# Altium PCB CW308T_NRF52840.PcbDoc
Units mil, origin at the board's own origin, x right, y up, seen from the top; angles counter-clockwise.
Board outline 2060 x 2540 mil, 2 copper layers (Top Layer, Bottom Layer); 36 components, 45 nets, 217 pads, 274 vias.
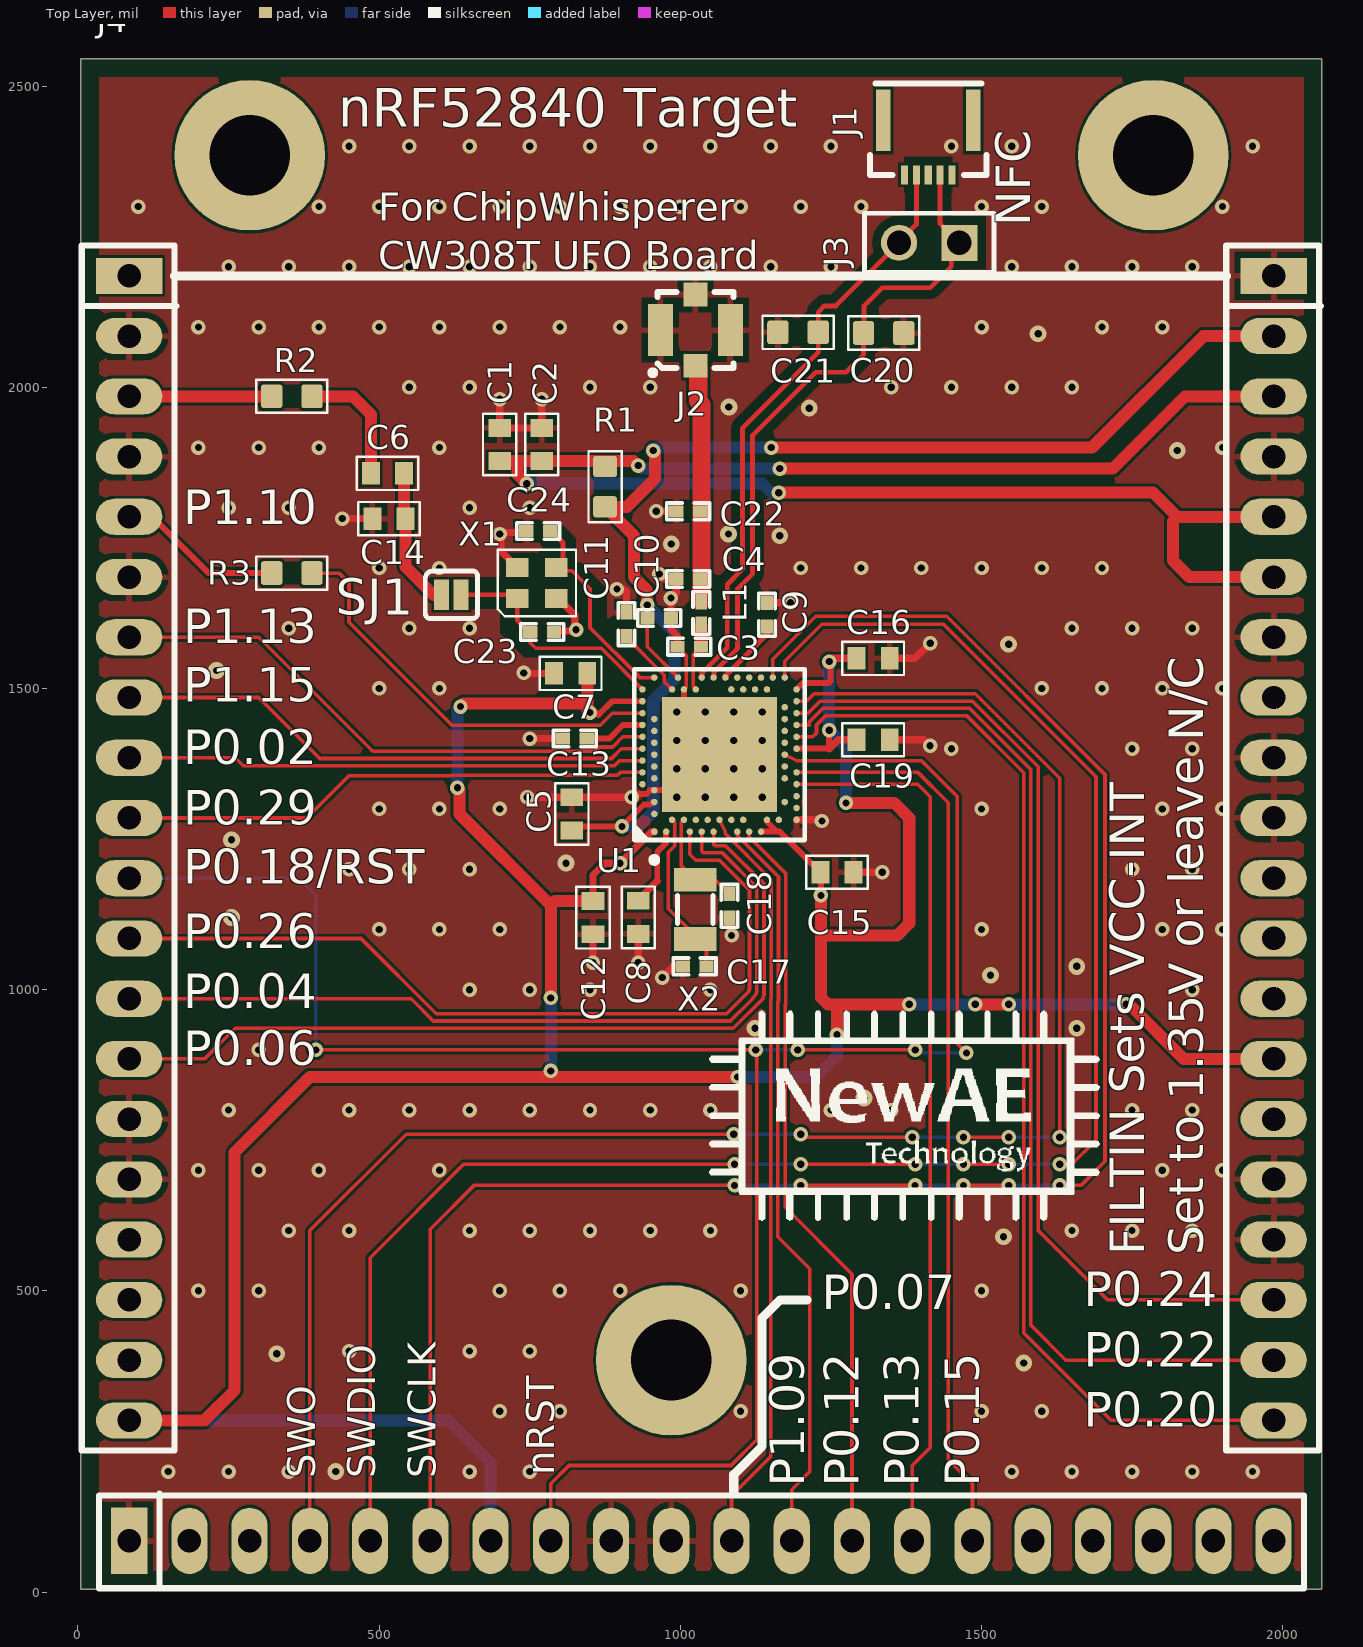
[diagram p0: Top Layer view]
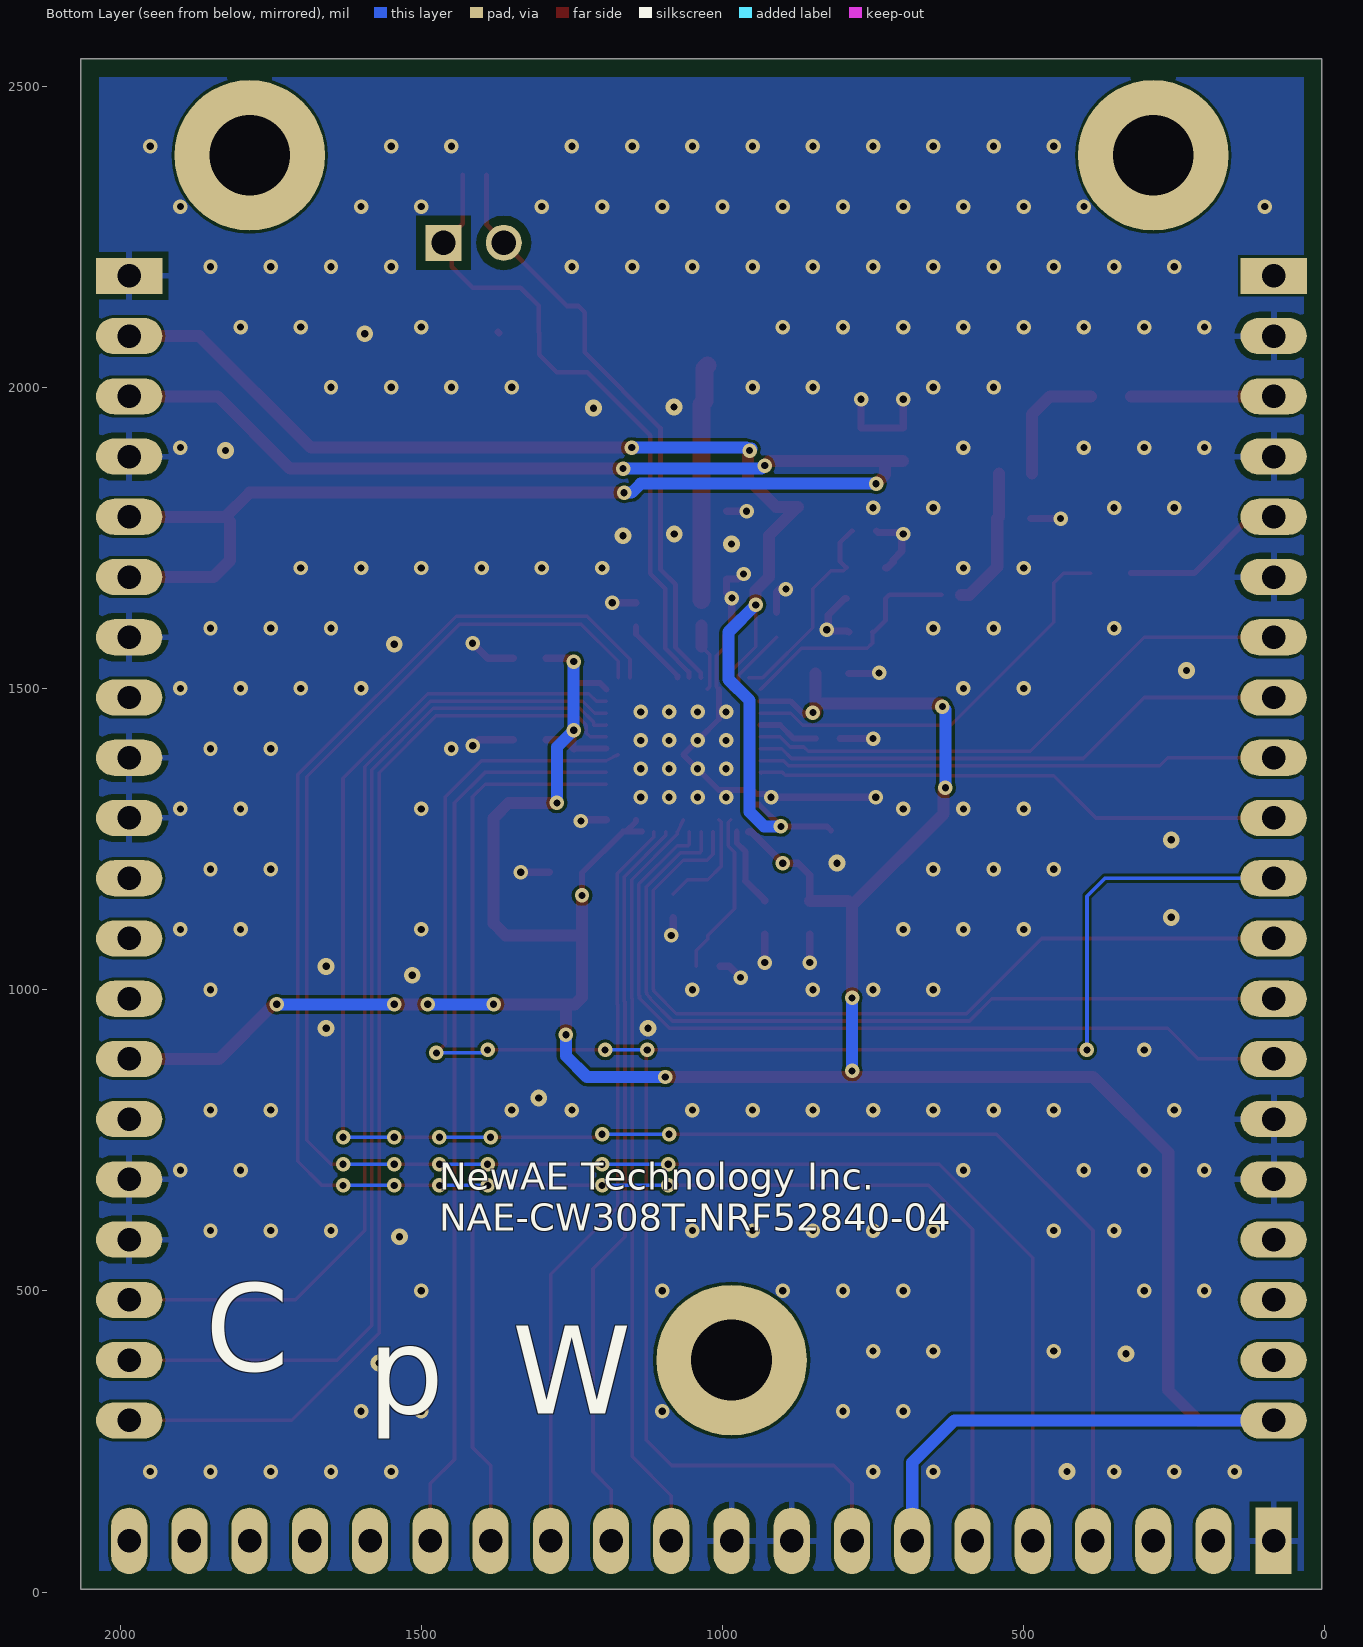
[diagram p1: Bottom Layer view, seen from below]

## Layer stack, top to bottom
Top Solder: solder mask 0.4, Solder Resist, Dk 3.5
Top Layer: signal copper 1.4
Dielectric 1: dielectric 12.6, FR-4, Dk 4.8
Bottom Layer: signal copper 1.4
Bottom Solder: solder mask 0.4, Solder Resist, Dk 3.5

## Board outline
5,5 5,2545 2065,2545 2065,5

## Design rules (kind name [scope] priority, off if disabled: settings)
BoardOutlineClearance Silk_to_Outline [(OnLayer('Top Overlay'))] p1: gap=0 ignorepadtopadclearanceinfootprint=FALSE
BoardOutlineClearance [All] p2: gap=30 ignorepadtopadclearanceinfootprint=FALSE
Clearance Clearance_NFC [InNet('NFC1') OR InNet('NFC2')] p1: gap=5 ignorepadtopadclearanceinfootprint=FALSE except(0: Arc-Hole Track-Hole SMDPad-Hole THPad-Hole Via-Hole Fill-Hole Poly-Hole Region-Hole Text-Hole; 15: Arc-Fill Arc-Poly Arc-Region Track-Fill Track-Poly Track-Region SMDPad-Fill SMDPad-Poly SMDPad-Region THPad-Fill THPad-Poly THPad-Region Via-Fill Via-Poly Via-Region Fill-Fill Fill-Poly Fill-Region Poly-Poly Poly-Region Region-Region)
Clearance [All] p2: gap=5 ignorepadtopadclearanceinfootprint=FALSE except(0: Arc-Hole Track-Hole SMDPad-Hole THPad-Hole Via-Hole Fill-Hole Poly-Hole Region-Hole Text-Hole)
HoleSize [All] p1: absolutevalues=TRUE maxlimit=200 minlimit=1 maxpercent=80.000 minpercent=20.000
MinimumSolderMaskSliver [All] p1: minsoldermaskwidth=5
PlaneConnect PlaneConnect_viaDirect [IsVia] p1: planeconnectstyle=Direct reliefexpansion=20 reliefentries=4 reliefconductorwidth=10 reliefairgap=10
PlaneConnect [All] p2: planeconnectstyle=Relief reliefexpansion=20 reliefentries=4 reliefconductorwidth=10 reliefairgap=10
PolygonConnect PolygonConnect_viaDirect [All vs isVia] p1: connectstyle=Direct reliefconductorwidth=10 reliefentries=4 polygonreliefangle="90 Angle" airgapwidth=10
PolygonConnect [All] p2: connectstyle=Relief reliefconductorwidth=10 reliefentries=4 polygonreliefangle="90 Angle" airgapwidth=10
RoutingVias [All] p1: holewidth=28 width=24 viastyle="Through Hole" minholewidth=12 minwidth=24 maxholewidth=12 maxwidth=50
SilkToSilkClearance [All] p1: silktosilkclearance=5
SilkToSolderMaskClearance [IsPad] p1: minsilkscreentomaskgap=5 clearancetoexposedcopper=TRUE
SolderMaskExpansion [All] p1: expansion=4 istentingtop=FALSE
Width [All] p1: maxlimit=100 minlimit=6 preferedwidth=8 minimp=50.000000 maximp=50.000000 favimp=50.000000
25 further rules are at their usual default settings.

## Classes and differential pairs
component class NRF52840_UFO: J4

## Components (designator, comment, footprint, x,y, rotation, side; value= is the part's Value field where it differs from the comment)
C1 "2u2" CAPC0603_M 700,1905 r90 top
C2 "100n" CAPC0603_M 770,1905 r90 top
C3 "1.0pF" CAPC1005X04L 1014.79,1569.35 r0 top
C4 "1.0pF" CAPC1005X04L 1013,1681.75 r0 top
C5 "1u" CAPC0603_M 820,1291.73 r90 top
C6 "100p" CAPC0603_M 513.77,1857.05 r180 top
C7 "100n" CAPC0603_M 817.95,1525 r180 top
C8 "100n" CAPC0603_M 930,1120 r270 top
C9 "820pF" CAPC1005X04L 1143.74,1622.44 r90 top
C10 "N.C." CAPC1005X04L 965,1616.75 r180 top
C11 "100pF" CAPC1005X04L 910.47,1606.69 r90 top
C12 "1u" CAPC0603_M 855,1119.39 r270 top
C13 "N.C." CAPC1005X04L 824.84,1416.73 r180 top
C14 "100p" CAPC0603_M 516.33,1782.05 r180 top
C15 "2u2" CAPC0603_M 1260,1195 r0 top
C16 "100n" CAPC0603_M 1320,1550 r0 top
C17 "12pF" CAPC1005X04L 1023.66,1038.68 r180 top
C18 "12pF" CAPC1005X04L 1081.73,1139.08 r270 top
C19 "100n" CAPC0603_M 1320,1415 r0 top
C20 "330p" RESC1608X55N 1337.6,2090.09 r0 top
C21 "330p" RESC1608X55N 1195.36,2091.14 r0 top
C22 "N.C." CAPC1005X04L 1013,1794.05 r180 top
C23 "12pF" CAPC1005X04L 770.68,1593.53 r0 top
C24 "12pF" CAPC1005X04L 763.97,1761.38 r180 top
J1 "FPC 0.5mm RA SMD" FPC_05P-0.5mm-RA-SMD 1450.94,2352.75 r180 top
J2 "0734120110" 0734120110 1025,2095 r0 top
J3 "MTLW-102-05-L-S-172" SMTC-MTLW-102-05-X-S-172 1463.13,2239.87 r180 top
J4 "CW308_TARGETCON" CW308_TBOARD_CONN 85,2185 r0 top locked
L1 "3.9nH" INDC1005X04L 1034.79,1625.35 r90 top
R1 "12R" RESC1608X55N 875,1835 r270 top
R2 "12R" RESC1608X55N 355,1985 r180 top
R3 "12R" RESC1608X55N 355,1691.59 r180 top
SJ1 "NO" SJ_2S_NO 620,1655.54 r0 top
U1 "nRF52840-QIAA" AQFN50P700X700X85_HS-74N 1065,1390.16 r90 top
X1 "ABM10AIG-32.000MHZ-4Z-T3" "2.5x2mm XTAL" 761.77,1675 r0 top value=32.000MHz
X2 "32.768kHz" XTAL_3215 1024.65,1133.17 r90 top

## Footprints (in the part's own frame and the unit in brackets; to place one, negate y for a bottom-side part, rotate by r counter-clockwise, add the part's x,y. Pads: shape width x height; smd on the part's side, far side on the other; paste and mask are expansions set on the pad)
"2.5x2mm XTAL" [mm]
  rect 0.95x0.8 smd: 1(-0.825,-0.65) 2(0.825,-0.65) 3(0.825,0.65) 4(-0.825,0.65)
  silkscreen extent -1.65,-1.4 1.65,1.4, body extent -1.27,-1 1.27,1, height 0.55
0734120110 [mm] "Molex 0734120110 (UMC)"
  rect 1x1 smd: 1(0,-1.5) 3(0,1.5)
  rect 1.05x2.2 smd: 2(-1.475,0) 4(1.475,0)
  silkscreen extent -1.9,-1.9 1.6,1.6, body extent -1.5,-1.54 1.5,1.54, height 1.29
AQFN50P700X700X85_HS-74N [mm] "AQFN, 73-Leads, Body 7.00x7.00mm, Pitch 0.50mm, Thermal Pad 4.95x4.95mm, IPC Medium Density"
  rect 4.85x4.85 smd paste-0.711 mask+0.05: 74(0,0)
  round 0.275 smd paste+0.012 mask+0.05: A8(-1.25,3.25) A10(-0.75,3.25) A12(-0.25,3.25) A14(0.25,3.25) A16(0.75,3.25) A18(1.25,3.25) A20(1.75,3.25) A22(2.25,3.25) A23(2.75,3.25) AA24(3.25,-2.25) AB2(-2.75,-2.5) AC5(-2,-2.75) AC9(-1,-2.75) AC11(-0.5,-2.75) AC13(0,-2.75) AC15(0.5,-2.75) AC17(1,-2.75) AC19(1.5,-2.75) AC21(2,-2.75) AC24(3.25,-2.75) AD2(-2.75,-3.25) AD4(-2.25,-3.25) AD6(-1.75,-3.25) AD8(-1.25,-3.25) AD10(-0.75,-3.25) AD14(0.25,-3.25) AD16(0.75,-3.25) AD18(1.25,-3.25) AD20(1.75,-3.25) AD22(2.25,-3.25) AD23(2.75,-3.25) B1(-3.25,2.75) B3(-2.5,2.75) B5(-2,2.75) B7(-1.5,2.75) B9(-1,2.75) B11(-0.5,2.75) B13(0,2.75) B15(0.5,2.75) B17(1,2.75) B19(1.5,2.75) B24(3.25,2.75) C1(-3.25,2.25) D2(-2.75,2) D23(2.75,2) E24(3.25,1.75) F2(-2.75,1.5) F23(2.75,1.5) G1(-3.25,1.25) H2(-2.75,1) H23(2.75,1) J1(-3.25,0.75) J24(3.25,0.75) K2(-2.75,0.5) L1(-3.25,0.25) L24(3.25,0.25) M2(-2.75,0) N24(3.25,-0.25) P2(-2.75,-0.5) P23(2.75,-0.5) R1(-3.25,-0.75) R24(3.25,-0.75) T2(-2.75,-1) T23(2.75,-1) U1(-3.25,-1.25) U24(3.25,-1.25) V23(2.75,-1.5) W1(-3.25,-1.75) W24(3.25,-1.75) Y2(-2.75,-2) Y23(2.75,-2)
  silkscreen extent -4.56,-3.6 3.6,3.6, body extent -3.55,-3.55 3.55,3.55, height 0.85
CAPC0603_M [mm]
  rect 0.75x0.95 smd: 1(-0.7,0) 2(0.7,0)
  silkscreen extent -1.3,-0.7 1.3,0.7, body extent -0.85,-0.45 0.85,0.45, height 0.9
CAPC1005X04L [mm] "Chip Capacitor, 2-Leads, Body 1.0x0.5mm, IPC High Density"
  rect 0.6x0.5 smd: 1(-0.5,0) 2(0.5,0)
  silkscreen extent -0.9,-0.35 0.9,0.35, body extent -0.51,-0.25 0.51,0.25, height 0.5
CW308_TBOARD_CONN [mil]
  rect 110x60 hole 39: A1(0,0) C1(1900,0)
  oval 110x60 hole 39: A2(0,-100) A3(0,-200) A4(0,-300) A5(0,-400) A6(0,-500) A7(0,-600) A8(0,-700) A9(0,-800) A10(0,-900) A11(0,-1000) A12(0,-1100) A13(0,-1200) A14(0,-1300) A15(0,-1400) A16(0,-1500) A17(0,-1600) A18(0,-1700) A19(0,-1800) A20(0,-1900) C2(1900,-100) C3(1900,-200) C4(1900,-300) C5(1900,-400) C6(1900,-500) C7(1900,-600) C8(1900,-700) C9(1900,-800) C10(1900,-900) C11(1900,-1000) C12(1900,-1100) C13(1900,-1200) C14(1900,-1300) C15(1900,-1400) C16(1900,-1500) C17(1900,-1600) C18(1900,-1700) C19(1900,-1800) C20(1900,-1900)
  rect 60x110 hole 39: B1(0,-2100)
  oval 60x110 hole 39: B2(100,-2100) B3(200,-2100) B4(300,-2100) B5(400,-2100) B6(500,-2100) B7(600,-2100) B8(700,-2100) B9(800,-2100) B10(900,-2100) B11(1000,-2100) B12(1100,-2100) B13(1200,-2100) B14(1300,-2100) B15(1400,-2100) B16(1500,-2100) B17(1600,-2100) B18(1700,-2100) B19(1800,-2100) B20(1900,-2100)
  round 250 hole 134: MH1(200,200) MH2(900,-1800) MH2(1700,200)
  silkscreen extent -79,-2179 1979,50, body extent -50,-2149 1950,50, height 48
FPC_05P-0.5mm-RA-SMD [mm] "FPC, 5-Leads, Pitch 0,5mm"
  rect 0.6x2.6 smd: 0(-0.9,-2.3) 0(2.9,-2.3)
  rect 0.3x0.8 smd: 1(0,0) 2(0.5,0) 3(1,0) 4(1.5,0) 5(2,0)
  silkscreen extent -1.45,-3.85 3.45,0, body extent -1.3,-3.85 3.3,0.2, height 1.2
INDC1005X04L [mm] "Chip Inductor, 2-Leads, Body 1.0x0.5mm, IPC High Density"
  rect 0.65x0.5 smd: 1(-0.475,0) 2(0.475,0)
  silkscreen extent -0.9,-0.35 0.9,0.35, body extent -0.5,-0.3 0.5,0.3, height 0.5
RESC1608X55N [mm] "Chip Resistor, Body 1.6x0.8mm, EIA 0603, IPC Medium Density"
  round 0.254 on Mech15: 0(0,0)
  rrect25% 0.9x1 smd: 1(-0.85,0) 2(0.85,0)
  Top Layer pour cut-out: -0.6,0.5 0.6,0.5 0.6,-0.5 -0.6,-0.5
  silkscreen extent -1.5,-0.7 1.5,0.7, body extent -0.87,-0.47 0.88,0.48, height 0.54
SJ_2S_NO [mil] "Solder Jumper, open (no paste)"
  rect 25x50 smd paste-393.7: 1(-16.22,0) 2(16.22,0)
  silkscreen extent -43,-39 43,39
SMTC-MTLW-102-05-X-S-172 [mm] "Terminal Assembly, 1x2 Pins, Vertical, 2.54mm Pitch, Male"
  rect 1.52x1.52 hole 1.02: 1(0,0)
  round 1.52 hole 1.02: 2(2.54,0)
  silkscreen extent -1.46,-1.24 4,1.24, body extent -1.27,-1.24 3.81,1.24, height 5.89
XTAL_3215 [mm] "XTAL SMD 3.2 x 1.5 mm"
  rect 1x1.8 smd: 1(-1.25,0) 2(1.25,0)
  silkscreen extent -0.6,-0.75 0.6,0.75, body extent -1.6,-0.75 1.6,0.75, height 0.81

## Part data
C1 C15: library part CCHIP-2u2-0603, "2u2, 0603", Case-EIA=0603, Case-Metric=1608, Manufacture 1=Samsung, Manufacture Part Number 1=CL10B225KP8NNNC, Rated Voltage=10VDC, Supplier Part Number 1=1276-1134-2-ND, Component Group=Capacitor, Component Type=Standard, Mounting Technology=SMT, Part Number=CCHIP-2u2-0603, Pin Count=2, Supplier 1=Digi-Key
C2 C7 C8 C16 C19: library part CCHIP-100n-0603, "100n, 0603", Case-EIA=0603, Case-Metric=1608, Manufacture 1=Kemet, Manufacture Part Number 1=C0603C104K5RACTU, Rated Voltage=50VDC, Supplier Part Number 1=399-5089-2-ND, Component Group=Capacitor, Component Type=Standard, Mounting Technology=SMT, Part Number=CCHIP-100n-0603, Pin Count=2, Supplier 1=Digi-Key
C3 C4: library part C0402-1.0p, "Capacitor, NP0, ±5%", Footprint Doc=0402, LatestRevisionDate=2017-02-23, Note=50V, Part Number=C0402-1.0p, Pin Count=2, Published=2009-05-08, Publisher="Nordic Semiconductor"
C5 C12: library part CCHIP-1u-0603, "1u, 0603, 50V", Case-EIA=0603, Case-Metric=1608, Manufacture Part Number 1=CL10A105KB8NNNC, Rated Voltage=50VDC, Supplier Part Number 1=1276-1860-1-ND, Component Group=Capacitor, Component Type=Standard, Mounting Technology=SMT, Part Number=CCHIP-1u-0603, Pin Count=2, Supplier 1=Digi-Key
C6 C14: library part CCHIP-100p-0603, "100p, 0603", Case-EIA=0603, Case-Metric=1608, Manufacture 1=KEMET, Manufacture Part Number 1=C0603C101K5RACTU, Rated Voltage=50V, Supplier Part Number 1=399-7824-1-ND, Component Group=Capacitor, Component Type=Standard, Mounting Technology=SMT, Part Number=CCHIP-100p-0603, Pin Count=2, RoHS=Yes, Supplier 1=Digi-Key
C9: library part C0402-820p, "Capacitor, NP0, ±5%", Footprint Doc=0402, LatestRevisionDate=2009-05-08, Note=50V, Part Number=C0402-820p, Pin Count=2, Published=2009-05-08, Publisher="Nordic Semiconductor"
C10 C13 C22: library part C0402-N.C., "Not mounted", Assembly="Not mounted", Footprint Doc=0402, LatestRevisionDate=2009-05-08, Part Number=C0402-N.C., Pin Count=2, Published=2009-05-08, Publisher="Nordic Semiconductor"
  C22: Note="Chip Cap"
C11: library part C0402-100p, "Capacitor, NP0, ±5%", Footprint Doc=0402, LatestRevisionDate=2009-05-08, Note=50V, Part Number=C0402-100p, Pin Count=2, Published=2009-05-08, Publisher="Nordic Semiconductor"
C17 C18 C23 C24: library part C0402-12p, "Capacitor, NP0, ±2%", Footprint Doc=0402, LatestRevisionDate=2011-05-11, Note=50V, Part Number=C0402-12p, Pin Count=2, Published=2009-05-08, Publisher="Nordic Semiconductor"
C20 C21: library part CCHIP-330P-0603-100V, "CAP CER 330PF 100V X7R 0603", Case-EIA=0603, Case-Metric=1608, Manufacture 1="Murata Electronics North America", Manufacture Part Number 1=GRM188R72A331KA01D, Rated Voltage=100V, Supplier Part Number 1=490-1464-1-ND, Tolerance=±10%, Component Group=Capacitor, Component Type=Standard, Mounting Technology=SMT, Part Number=CCHIP-330P-0603-100V, Pin Count=2, PP Material Stack=0, PP Rotation=0, Supplier 1=Digi-Key
J1: library part FPC_05P-0.5mm-RA-SMD, "0.5mm FPC, 5P,Right Angle SMT,Double Contact,H=1.2mm,White, Tin plated", 2nd source part number=WM9836CT-ND, Manufacturer=W-CON, Manufacturer Part Number=5141-05RZDNWR01, Part number IPS=00000007792, 2nd source Supplier=Digi-Key, Artikkelnr Noca=55010020, Artikkelnr Simpro=N.A., Datasheet=\\hizz\pro\app9717\Datasheet\connectores\W-CON\5141-XXRZDNXX0X.pdf, Footprint Doc=FPC_05P-0.5mm-RA-SMD, LatestRevisionDate=2016-04-21, Part Number=FPC_05P-0.5mm-RA-SMD, Pin Count=7, Published=2015-06-22, Publisher="Nordic Semiconductor", Supplier=Cabcon, Supplier part number=5141-05RZDNWR01
J2: library part UMC_MALE, "UMC RCPT STR 50 OHM SMD", Manufacture 1=Molex, Supplier Part Number 1=WM5587CT-ND, Component Group=Connector, Component Type=Standard, Manufacture Part Number 1=0734120110, Mounting Technology=SMT, Part Number=UMC_MALE, Pin Count=5, PP Material Stack=0, PP Rotation=0, RoHS=Yes, Supplier 1=Digi-Key
J3: library part CMP-1024-00067-1, Manufacturer=Samtec, Temperature Range="-55 to 125 degC", ComponentLink1Description="Manufacturer URL", ComponentLink1URL=http://www.samtec.com, ComponentLink2Description=Datasheet, ComponentLink2URL=http://www.samtec.com/documents/webfiles/pdf/MTLW_TH.PDF, ComponentLink3Description="Package Specification", ComponentLink3URL=http://www.samtec.com/documents/webfiles/cpdf/MTLW-1XX-XX-XX-X-XXX-XX-XX-MKT1.pdf, DatasheetVersion=F-214, Mounting Technology=Through-hole, Orientation=Vertical, PackageDescription="Low Profile Terminal Assembly", PackageReference=MTLW-102-05-X-S-172, PackageVersion="T, 6/1991", PartNumber=MTLW-102-05-L-S-172, Pitch="2.54 mm", RoHS=True
J4: library part CW308_TBOARD, "CW308 \"Standard\" Target Board Connector", Component Group=Mechanical, Component Type=Standard, Mounting Technology=Through-hole, Part Number=CW308_TBOARD, Pin Count=60, Pitch=2.54mm
L1: library part L0402-3n9, "High frequency chip inductor ±5%", Footprint Doc=0402, LatestRevisionDate=2012-09-19, Part Number=L0402-3n9, Pin Count=2, Published=2009-05-08, Publisher="Nordic Semiconductor"
R1 R2 R3: library part RCHIP-12R-0603, "12R res, 0603, 1%, 1/10W", Case-EIA=0603, Case-Metric=1608, Manufacture 1=Yageo, Manufacture Part Number 1=RC0603FR-0712RL, Rated Power=0.1W, Rated Voltage=75VDC, Supplier Part Number 1=311-12.0HRCT-ND, Temperature Range="-55C to 155C", Tolerance=1%, Component Group=Resistor, Component Type=Standard, Mounting Technology=SMT, Part Number=RCHIP-12R-0603, Pin Count=2, Supplier 1=Digi-Key
SJ1: library part SJ_2S_NO, "Solder Jumper, NO", Component Group="PCB Feature", Component Type="Standard (No BOM)", Mounting Technology=COPPER, Part Number=SJ_2S_NO, Pin Count=2
U1: library part nRF52840-QIAAC0, "Multi-protocol Bluetooth Low Energy, IEEE 802.15.4, ANT and 2.4GHz proprietary system-on-chip", Manufacturer="Nordic Semiconductor", Footprint Doc=AQFN-73, LatestRevisionDate=2018-02-27, Manufacturer Part Number=nRF52840-QIAAC0, Part Number=nRF52840-QIAAC0, Pin Count=73, Published=2017-08-21, Publisher="Nordic Semiconductor"
X1: "32MHz, SMD", Manufacture 1="Abracon LLC", Supplier Part Number 1=535-13368-1-ND, Component Group=Crystal, Component Type=Standard, Manufacture Part Number 1=ABM10AIG-32.000MHZ-4Z-T3, Part Number=ABM10AIG-32.000MHZ-4Z-T3, Pin Count=4, PP Material Stack=0, PP Rotation=0, Supplier 1=Digi-Key
X2: library part XTAL_SMD3215_32.768kHz_9pF_General, "XTAL SMD 3215, 32.768kHz, Cl=9pF, Total Tol: ±50ppm", Footprint Doc=XTAL_3215, LatestRevisionDate=2016-08-19, Part Number=XTAL_SMD3215_32.768kHz_9pF_General, Pin Count=2, Published=2016-08-19, Publisher="Nordic Semiconductor"

## Via types
v1: diameter 24, hole 12, Top Layer to Bottom Layer, tented both sides, 253 vias
v2: diameter 28, hole 12, Top Layer to Bottom Layer, tented both sides, 21 vias

## Nets (pads, with @x,y where several pads share a name; then routed paths per layer and width w, separated by ;. In a path a pad name is that pad's centre, name@x,y a point inside that pad or via, vN(x,y) a via of type N, cw(c..) or ccw(c..) an arc to the next point about the centre after c; other vN are vias at no path point)
CLKIN: J4.A3 R2.2 | length 236.5
  Top Layer w20: J4.A3 R2.2
CLKOUT: J4.A5 R3.2 | length 275.2
  Top Layer w10: J4.A5 123.56,1785 216.97,1691.59 R3.2
DEC1: C8.1 U1.C1 | length 133.9
  Top Layer w9.84: 961.65,1180.51 961.65,1228.74 976.42,1243.5 U1.C1
  Top Layer w12: C8.1 930,1148.86 961.65,1180.51
DEC3: C11.1 U1.D23 | length 118
  Top Layer w6: C11.1@910.47,1585.04 973.46,1522.05 973.46,1511.22 U1.D23
GND: C1.2 C2.2 C3.1 C4.1 C5.2 C7.2 C8.2 C9.2 C10.1 C11.2 C12.2 C13.2 C14.2 C15.2 C16.2 C17.2 C18.2 C19.2 C20.2 C21.1 C22.2 C23.2 C24.2 J2.2 J2.3 J2.4 J4.A2 J4.A4 J4.A6 J4.A15 J4.A16 J4.B1 J4.B9 J4.B10 J4.C1 J4.C4 J4.C7 J4.C9 J4.C10 J4.C16 J4.C17 U1.74 U1.AD2 U1.B7 U1.F23 X1.2 X1.4 | length 1782.6
  Top Layer w6: C3.1 1010.08,1554.38 1010.08,1502.56 U1.F23
  Top Layer w9.84: v1@921.59,1324.9 943.69,1324.9 949.89,1331.1 U1.B7 1005.94,1331.1 U1.74 v1(1041.38,1413.78) 1005.94,1449.21 U1.F23
  Top Layer w12: v1(438.77,1782.05) C14.2 ; v1(700,1980) C1.2 C2.2 v1(770,1980) ; X1.4 726.34,1700.59 716.59,1710.34 716.59,1713.29 702.3,1727.59 702.3,1754.18 v1(700,1756.47) 702.3,1758.77 741.66,1758.77 C24.2 ; v1(740,1525.73) 740.73,1525 C7.2 ; v1(745.71,1319.29) C5.2 v1(919.33,1319.29) ; v1(750,1416.73) C13.2 ; C23.2 792.37,1595.53 824.89,1595.53 v1(826.89,1597.52) 824.59,1599.82 824.59,1622.02 797.2,1649.41 X1.2 ; v1(855,1045) C12.2 ; v1(894.69,1665) 906.06,1665 910.47,1660.59 C11.2 ; v1(930,1045) C8.2 ; v1(960,1794.05) C22.2 ; v1(965,1690) 973.25,1681.75 C4.1 993.32,1658.94 v1(984.37,1650) 984.68,1649.69 C10.1 984.68,1597.52 995.1,1587.11 C3.1 ; v1(970,1020) 988.68,1038.68 C17.2 ; C18.2 1081.73,1093.23 v1(1085,1089.96) ; C9.2 v1(1182.88,1642.12) ; U1.AD2 1233.11,1281.89 v1(1235,1280) ; C15.2 v1(1335,1195) ; C19.2 1404.66,1415 v1(1414.66,1405) ; C16.2 1389.66,1550 1414.66,1575 v1(1415,1575) ; C20.2 C20.2@1372.64,2091.67
  other v1: 150,200 250,200 350,200 650,200 750,200 1550,200 1650,200 1750,200 1850,200 1950,200 700,300 800,300 1100,300 1500,300 1600,300 450,400 650,400 750,400 200,500 300,500 700,500 800,500 900,500 1100,500 1500,500 350,600 450,600 650,600 750,600 850,600 950,600 1050,600 1650,600 1750,600 1850,600 200,700 300,700 400,700 600,700 1800,700 1900,700 250,800 450,800 550,800 650,800 750,800 850,800 950,800 1050,800 1250,800 1350,800 1750,800 1850,800 300,900 650,1000 750,1000 850,1000 1050,1000 1850,1000 500,1100 600,1100 700,1100 1500,1100 1800,1100 1900,1100 450,1200 550,1200 650,1200 1750,1200 1850,1200 500,1300 600,1300 700,1300 1500,1300 1800,1300 1900,1300 994.13,1319.29 1041.38,1319.29 1088.62,1319.29 1135.87,1319.29 994.13,1366.54 1041.38,1366.54 1088.62,1366.54 1135.87,1366.54 1450,1400 1750,1400 1850,1400 994.13,1413.78 1088.62,1413.78 1135.87,1413.78 994.13,1461.02 1041.38,1461.02 1088.62,1461.02 1135.87,1461.02 500,1500 600,1500 1600,1500 1700,1500 1800,1500 1900,1500 350,1600 550,1600 650,1600 1650,1600 1750,1600 1850,1600 500,1700 600,1700 1200,1700 1300,1700 1400,1700 1500,1700 1600,1700 1700,1700 250,1800 350,1800 650,1800 750,1800 200,1900 300,1900 400,1900 600,1900 1900,1900 550,2000 650,2000 850,2000 950,2000 1350,2000 1450,2000 1550,2000 1650,2000 200,2100 300,2100 400,2100 500,2100 600,2100 700,2100 800,2100 900,2100 1500,2100 1700,2100 1800,2100 250,2200 350,2200 450,2200 550,2200 650,2200 750,2200 850,2200 950,2200 1050,2200 1150,2200 1250,2200 1550,2200 1650,2200 1750,2200 1850,2200 100,2300 400,2300 500,2300 600,2300 700,2300 800,2300 900,2300 1000,2300 1100,2300 1200,2300 1300,2300 1500,2300 1600,2300 1900,2300 450,2400 550,2400 650,2400 750,2400 850,2400 950,2400 1050,2400 1150,2400 1250,2400 1450,2400 1550,2400 1950,2400
  other v2: 427.96,200 1570,380 330,395.44 1536.42,589.87 1305,819.94 1123.78,936 1658,936 1515.06,1023.84 1658,1038.68 255,1120.07 810,1210 255,1248.69 229.77,1529.65 1545,1573.34 985,1739.79 1165,1753.54 1080.04,1756.47 1825,1895 1214.09,1965.31 1080.47,1967.32 1594,2088.84
GPIO1_TX: J4.A7 U1.A16 | length 940.4
  Top Layer w6: J4.A7 300,1585 489.27,1395.73 857.91,1395.73 864.99,1402.81 887.73,1402.81 904.6,1419.68 U1.A16
GPIO2_RX: J4.A8 U1.A14 | length 900.7
  Top Layer w6: J4.A8 300,1485 401.27,1383.73 885.62,1383.73 901.89,1400 U1.A14
GPIO3: J4.A9 U1.A12 | length 861.1
  Top Layer w6: J4.A9 261,1385 274.27,1371.73 890.59,1371.73 899.17,1380.31 U1.A12
GPIO4: J4.A10 U1.A10 | length 885.3
  Top Layer w6: J4.A10 380,1285 450,1355 620.3,1355 621.3,1356 895.68,1356 900.31,1360.63 U1.A10 U1.A10@935.67,1359.25
HDR1: J4.B11 U1.M2 | length 1258
  Top Layer w6: U1.M2 1074.84,1262.2 1074.84,1258.62 1150.86,1182.6 1150.86,985.54 1149.9,984.58 1149.9,224.9 1085,160 J4.B11
HDR2: J4.B12 U1.R1 | length 1240.3
  Top Layer w6: U1.R1 1094.53,1255.91 1162.86,1187.58 1162.86,980.57 1161.9,979.61 1161.9,589.87 1215,536.77 1215,200 1185,170 J4.B12
HDR3: J4.B13 U1.U1 | length 1248.7
  Top Layer w6: U1.U1 1114.21,1253.35 1174.86,1192.7 1174.86,975.6 1173.9,974.64 1173.9,638.7 1285,527.6 J4.B13
HDR4: J4.B14 U1.AD8 | length 1478.1
  Top Layer w6: U1.AD8 1345,1340.94 1394.06,1340.94 1415,1320 1415,240 1385,210 J4.B14
HDR5: J4.B15 U1.AD10 | length 1514.6
  Top Layer w6: U1.AD10 1394.37,1360.63 1444.92,1310.08 1444.92,220.08 1485,180 J4.B15
HDR6: J4.B16
HDR7: J4.B17
HDR8: J4.B18
HDR9: J4.B19
HDR10: J4.B20
LED1: J4.C18 U1.AD20 | length 1663.1
  Top Layer w6: U1.AD20 1211.99,1459.06 1231.94,1479 1484.94,1479 1594,1369.94 1594,600 1709,485 J4.C18
LED2: J4.C19 U1.AD18 | length 1794.8
  Top Layer w6: U1.AD18 1193.11,1439.21 1214.09,1439.21 1214.09,1444.18 1236.91,1467 1479.97,1467 1582,1364.97 1582,443 1640,385 J4.C19
LED3: J4.C20 U1.AD16 | length 1843.8
  Top Layer w6: U1.AD16 1219.68,1419.68 1226.09,1426.09 1226.09,1439.21 1241.88,1455 1475,1455 1570,1360 1570,430 1715,285 J4.C20
MISO: J4.A13 U1.J1 | length 1402.3
  Top Layer w6: J4.A13 553.03,985 590.03,948 1083,948 1120,985 1120,986.26 1125.9,992.16 1125.9,994.52 1126.86,995.48 1126.86,1170.14 1070,1227 1038,1227 1035.47,1229.53 U1.J1
MOSI: J4.A14 U1.L1 | length 1416.6
  Top Layer w6: J4.A14 210,885 261,936 1087.97,936 1137.9,985.93 1137.9,989.55 1138.86,990.51 1138.86,1175.25 1075.11,1239 1057.03,1239 1055.16,1240.87 U1.L1
NetC3_2: C3.2 L1.1 U1.H23 | length 113.7
  Top Layer w6: U1.H23 1021.5,1502.56 1021.5,1556.31 1034.66,1569.47 C3.2@1034.86,1569.67
  Top Layer w20: C3.2@1034.66,1569.47 L1.1@1034.66,1604.67
NetC6_1: C6.1 C14.1 SJ1.1 | length 231.8
  Top Layer w20: C14.1@541.33,1784.61 C6.1 ; C14.1 543.89,1701.68 590.03,1655.54 SJ1.1
NetC6_2: C6.2 R2.1 | length 208.1
  Top Layer w20: R2.1 456.21,1985 486.21,1955 C6.2
NetC9_1: C9.1 U1.N24 | length 113.2
  Top Layer w9: U1.N24@1074.84,1521.11 1143.74,1590.01
  Top Layer w9.84: U1.N24 U1.N24@1074.84,1521.11 ; 1143.74,1590.01 C9.1
NetC13_1: C13.1 U1.A18 | length 101.9
  Top Layer w9.84: C13.1 881.96,1416.73 904.6,1439.37 U1.A18
NetC23_1: C23.1 SJ1.2 U1.A23 X1.1 | length 398.5
  Top Layer w6: C23.1@749.03,1593.53 751,1591.56 751,1575.34 759.81,1566.54 868.94,1566.54 U1.A23
  Top Layer w8: SJ1.2 723.16,1655.54 X1.1 729.29,1613.27 749.03,1593.53 C23.1
NetC24_1: C24.1 U1.B24 X1.3 | length 351.3
  Top Layer w6: X1.3 799.21,1695.63 820,1695.63 850,1665.63 850,1601.03 932.92,1518.11 U1.B24
  Top Layer w8: C24.1 785.62,1761.38 805.16,1741.85 805.16,1711.5 X1.3
NetR3_1: R3.1 U1.A20 | length 699.6
  Top Layer w6: R3.1 433.41,1691.59 450,1675 450,1610 621,1439 866.8,1439 886.85,1459.06 U1.A20
NFC1: C20.1 J1.2 J3.1 U1.L24 | length 1092.8
  Top Layer w8: U1.L24 1055.7,1518.65 1055.7,1527.23 1095,1566.54 1095,1665.63 1120,1690.63 1120,1920.1 1224.9,2025 1275,2025 1304.13,2054.13 C20.1 1305,2090.96 1305,2135 1335.35,2165.35 1415,2165.35 1449.65,2200 1449.65,2226.38 J3.1 1431.26,2271.74 J1.2
NFC2: C21.2 J1.4 J3.2 U1.J24 | length 993.4
  Top Layer w8: U1.J24 1036.01,1518.65 1036.01,1525.93 1077.79,1567.71 1077.79,1672.62 1103.04,1697.87 1103.04,1932.18 1228.83,2057.97 C21.2 1228.83,2124.61 1239.21,2135 1258.26,2135 J3.2 1363.13,2241.63 1391.89,2270.39 J1.4
NRST: J4.A11 J4.B8 U1.AC13 | length 3519.6
  Top Layer w6: v1(395,900) v1(1125,900) 1126.86,898.14 1126.86,252.8 1084.06,210 815.16,210 785,179.84 J4.B8 ; U1.AC13 1192.95,1380.31 1399.69,1380.31 1460,1320 1460,910 v1(1475,895) ; v1(1195,900) v1(1390,900)
  Bottom Layer w6: J4.A11 365,1185 395,1155 v1(395,900) ; v1(1125,900) v1(1195,900) ; v1(1390,900) 1395,895 v1(1475,895)
P0.00/XL1: C17.1 U1.D2 X2.1 | length 275.4
  Top Layer w6: U1.D2 990.39,1277.76 990.39,1238.78 989.9,1238.29 989.9,1237.92 980.06,1228.08 980.06,1134.55 1024.65,1089.96 X2.1 1043.35,1065.26 C17.1
P0.01/XL2: C18.1 U1.F2 X2.2 | length 177.5
  Top Layer w6: U1.F2 1001.81,1277.76 1001.81,1205.22 X2.2 1058.11,1182.39 C18.1
RF: C4.2 C22.1 J2.1 L1.2 | length 393.3
  Top Layer w30: J2.1 1029.69,2031.26 1029.69,1976.89 1035,1971.57 L1.2@1035,1646.75
SCK: J4.A12 U1.G1 | length 1425.5
  Top Layer w6: J4.A12 470,1085 595,960 1076.77,960 1113.9,997.13 1113.9,999.49 1114.86,1000.45 1114.86,1165.14 1065,1215 1025.79,1215 1015.79,1225 U1.G1
SHUNTH: C1.1 C2.1 J4.C3 J4.C5 J4.C6 R1.1 | length 2890.2
  Top Layer w20: C1.1 730,1877.44 ; v1(745,1840) 730,1855 730,1877.44 ; v1(930,1870) 922.56,1877.44 C2.1 730,1877.44 ; v1(1163.43,1825) 1785,1825 1825,1785 J4.C5 ; v1(1165,1865) 1718,1865 1838,1985 J4.C3 ; 1817.5,1777.5 1817.5,1712.5 1845,1685 J4.C6
  Bottom Layer w20: v1(745,1840) 1135.87,1840 1150.87,1825 v1(1163.43,1825) ; v1(930,1870) 935,1865 v1(1165,1865)
SHUNTL: C5.1 C10.2 J4.C2 R1.2 U1.B5 U1.E24 | length 2191.9
  Top Layer w6: v1(944.92,1638.75) 944.92,1569.29 U1.E24
  Top Layer w9.84: C5.1 826.89,1271.06 v1(903.11,1271.06) 939.52,1307.48 949.79,1307.48 953.73,1311.42 U1.B5
  Top Layer w20: v1(944.92,1638.75) 944.92,1662.91 923,1684.83 923,1753.54 R1.2 911.33,1801.54 958,1848.21 958,1892 v1(955,1895) ; v1(1150.86,1900) 1683.43,1900 1868.43,2085 J4.C2
  Bottom Layer w20: v1(903.11,1271.06) 931.06,1271.06 955,1295 955,1480 990,1515 990,1593.67 v1(944.92,1638.75) ; v1@952,1898 v1(955,1895) 960,1900 v1(1150.86,1900)
SWDCLK: J4.B6 U1.AA24 | length 3051.6
  Top Layer w6: J4.B6 585,602.44 657.56,675 v1(1090,675) ; U1.AA24 1153.58,1548.58 1225,1620 1442.15,1620 1705,1357.15 1705,715 1665,675 v1(1630,675) ; v1(1200,675) v1(1389.66,675) ; v1(1470,675) v1(1545,675)
  Bottom Layer w6: v1(1090,675) v1(1200,675) ; v1(1389.66,675) v1(1470,675) v1@1475,675 ; v1(1545,675) v1(1630,675)
SWDIO: J4.B5 U1.AC24 | length 3038.2
  Top Layer w6: J4.B5 485,555 640,710 v1(1090,710) ; U1.AC24 1173.27,1545 1234.92,1606.65 1436.77,1606.65 1690,1353.43 1690,750 1650,710 v1(1630,710) ; v1@1195,710 v1(1200,710) v1(1390,710) ; v1(1470,710) v1(1545,710)
  Bottom Layer w6: v1(1090,710) v1(1200,710) ; v1(1390,710) v1(1470,710) ; v1(1545,710) v1(1630,710)
SWO: J4.B4 U1.AD22 | length 2929.8
  Top Layer w6: J4.B4 385,600 545,760 v1(1088.62,760) ; U1.AD22 1209.26,1478.74 1221.99,1491.47 1489.45,1491.47 1630,1350.91 v1(1630,755) ; v1(1200,760) 1205,755 v1(1385,755) ; v1@1465,755 v1(1470,755) v1(1545,755)
  Bottom Layer w6: v1(1088.62,760) v1(1200,760) ; v1(1385,755) v1(1470,755) ; v1(1545,755) v1(1630,755)
VCC: C7.1 C12.1 C15.1 C16.1 C19.1 J4.A20 J4.B7 J4.C14 U1.A22 U1.AD14 U1.AD23 U1.B1 U1.W1 U1.Y2 | length 5925.3
  Top Layer w9.84: v1(850,1460) 860.31,1460 864.21,1456.1 886.85,1478.74 U1.A22 ; U1.W1 1160.42,1262.2 ; U1.Y2 1143.74,1278.89 1160.42,1262.2 ; U1.AD14 1247.09,1400 v1(1247.09,1430.51) ; U1.AD23 1203.78,1509.25 1247.09,1509.25 1249.06,1511.22 v1@1249.06,1544.68 ; v1(1233.31,1156.48) 1233.31,1193.88 1164.98,1262.2 1160.42,1262.2
  Top Layer w12: C12.1 855,1190.22 874.78,1210 v1(900,1210) 952.2,1262.2 U1.B1 ; 1247.09,1400 1262.09,1415 C19.1 ; v1(1247.09,1544.68) 1252.4,1550 C16.1
  Top Layer w20: J4.A20 210,285 260,335 260,730 385,855 v1(1095,855) ; v1(630,1335) 633.27,1331.73 633.27,1291.73 785,1140 ; v1(635,1470) 640,1475 845.51,1475 ; v1(785,986.26) 785,1140 ; C7.1 845.51,1475 ; v1(850,1460) 846.54,1460 845.51,1461.02 845.51,1475 ; C12.1 791.95,1146.95 785,1140 ; v1(1233.31,1156.48) 1233.31,1089.96 ; v1(1260,925) 1260,975.6 ; v1(1275,1310) 1355,1310 1380,1285 1380,1110 1359.96,1089.96 1233.31,1089.96 ; v1(1380,975.6) 1260,975.6 ; v1(1489.45,975.6) v1(1545,975.6) ; v1(1740,975.6) 1745,975.6 1835.6,885 J4.C14 ; 1233.31,1089.96 1233.31,987.26 1244.97,975.6 1260,975.6
  Bottom Layer w20: J4.A20 615,285 685,215 J4.B7 ; v1(630,1335) 630,1465 v1(635,1470) ; v1(785,865) v1(785,986.26) ; v1(1095,855) 1225,855 1260,890 v1(1260,925) ; v1(1247.09,1544.68) v1(1247.09,1430.51) 1275,1402.6 v1(1275,1310) ; v1(1380,975.6) v1(1489.45,975.6) ; v1(1545,975.6) v1(1740,975.6)
pads on no net: C20.0 C21.0 J1.0 J1.1 J1.3 J1.5 J4.A1 J4.A17 J4.A18 J4.A19 J4.B2 J4.B3 J4.C8 J4.C11 J4.C12 J4.C13 J4.C15 J4.MH1 J4.MH2 R1.0 R2.0 R3.0 U1.A8 U1.AB2 U1.AC5 U1.AC9 U1.AC11 U1.AC15 U1.AC17 U1.AC19 U1.AC21 U1.AD4 U1.AD6 U1.B3 U1.B9 U1.B11 U1.B13 U1.B15 U1.B17 U1.B19 U1.H2 U1.K2 U1.P2 U1.P23 U1.R24 U1.T2 U1.T23 U1.U24 U1.V23 U1.W24 U1.Y23

## Polygon pours and split planes (outlines as drawn)
GND on Bottom Layer "GND" (solid, remove dead copper, pour order 0): 0,2650 5,2645 2220,2645 2220,15 2205,0 0,0
GND on Top Layer "GND" (solid, remove dead copper, pour order 2): 0,2660 55,2715 2280,2715 2280,20 2260,0 0,0

## Other copper
Top Layer:
  pour cut-out: 716.59,1711.82 720.5,1715.72 752.95,1715.72 770.55,1733.33 770.55,1772.76 774.02,1776.23 800.46,1776.23 800.46,1776.01 826.89,1749.58 826.89,1710.52 833.42,1710.52 878.7,1665.24 878.7,1612.38 887.81,1612.38 906.06,1594.14 900,1588.08 900,1551.03 740.52,1551.03 700,1591.55 700,1631.38 657.03,1631.38 651.81,1636.6 653.72,1638.5 653.72,1685.54 700.94,1685.54 702.3,1684.18
  pour cut-out: 1094.53,1400 1035.47,1400 1035.47,1498.43 1094.53,1498.43
  pour cut-out: 1077.79,1521.35 1077.79,1629.33 1004.96,1629.33 1004.96,1597.83 963.79,1597.83 963.79,1521.35

## Silkscreen, mask and mechanical layers (free items; w line width, h text height)
Top Overlay:
  drawing of 22 lines, arcs and shapes, not listed
  text "nRF52840 Target" at 431.88,2410.73 h110
  text "NFC" at 1599.9,2267.41 h98.43 r90
  text "For ChipWhisperer / CW308T UFO Board" at 498.77,2180.47 h80
  text "P1.10" at 175,1753.54 h98.43
  text "P1.13" at 175,1556.31 h98.43
  text "P1.15" at 175,1459.06 h98.43
  text "P0.02" at 175,1355 h98.43
  text "P0.29" at 175,1255 h98.43
  text "P0.18/RST" at 175,1156.8 h98.43
  text "P0.26" at 175,1050 h98.43
  text "P0.04" at 175,950 h98.43
  text "P0.06" at 175,855 h98.43
  text "FILTIN Sets VCC-INT / Set to 1.35V or leave N/C" at 1887.5,559.06 h98.43 r90
  text "P0.24" at 1670,455 h98.43
  text "P0.07" at 1235,450 h98.43
  text "P0.22" at 1670,355 h98.43
  text "P0.20" at 1670,255 h98.43
  text "nRST" at 806.79,194.06 h80 r90
  text "SWO" at 409.35,189.06 h80 r90
  text "SWDIO" at 509.35,189.06 h80 r90
  text "SWCLK" at 609.96,189.06 h80 r90
  text "P1.09" at 1225,175 h98.43 r90
  text "P0.12" at 1315,175 h98.43 r90
  text "P0.13" at 1415,175 h98.43 r90
  text "P0.15" at 1515,175 h98.43 r90
Bottom Overlay:
  text "NewAE Technology Inc. / NAE-CW308T-NRF52840-04" at 1470,600 h45
  text "C" at 1859,318 h250
  text "W" at 1349,248 h250
  text "p" at 1589,248 h250
Mechanical 1:
  the board outline again, w10

## Dimensions
2065,2545 to 2065,5 on Drill Guide
5,2545 to 2065,2545 on Drill Guide